# EAGLE board 00A-023 FRDM Protoboard (EAGLE 6.3)
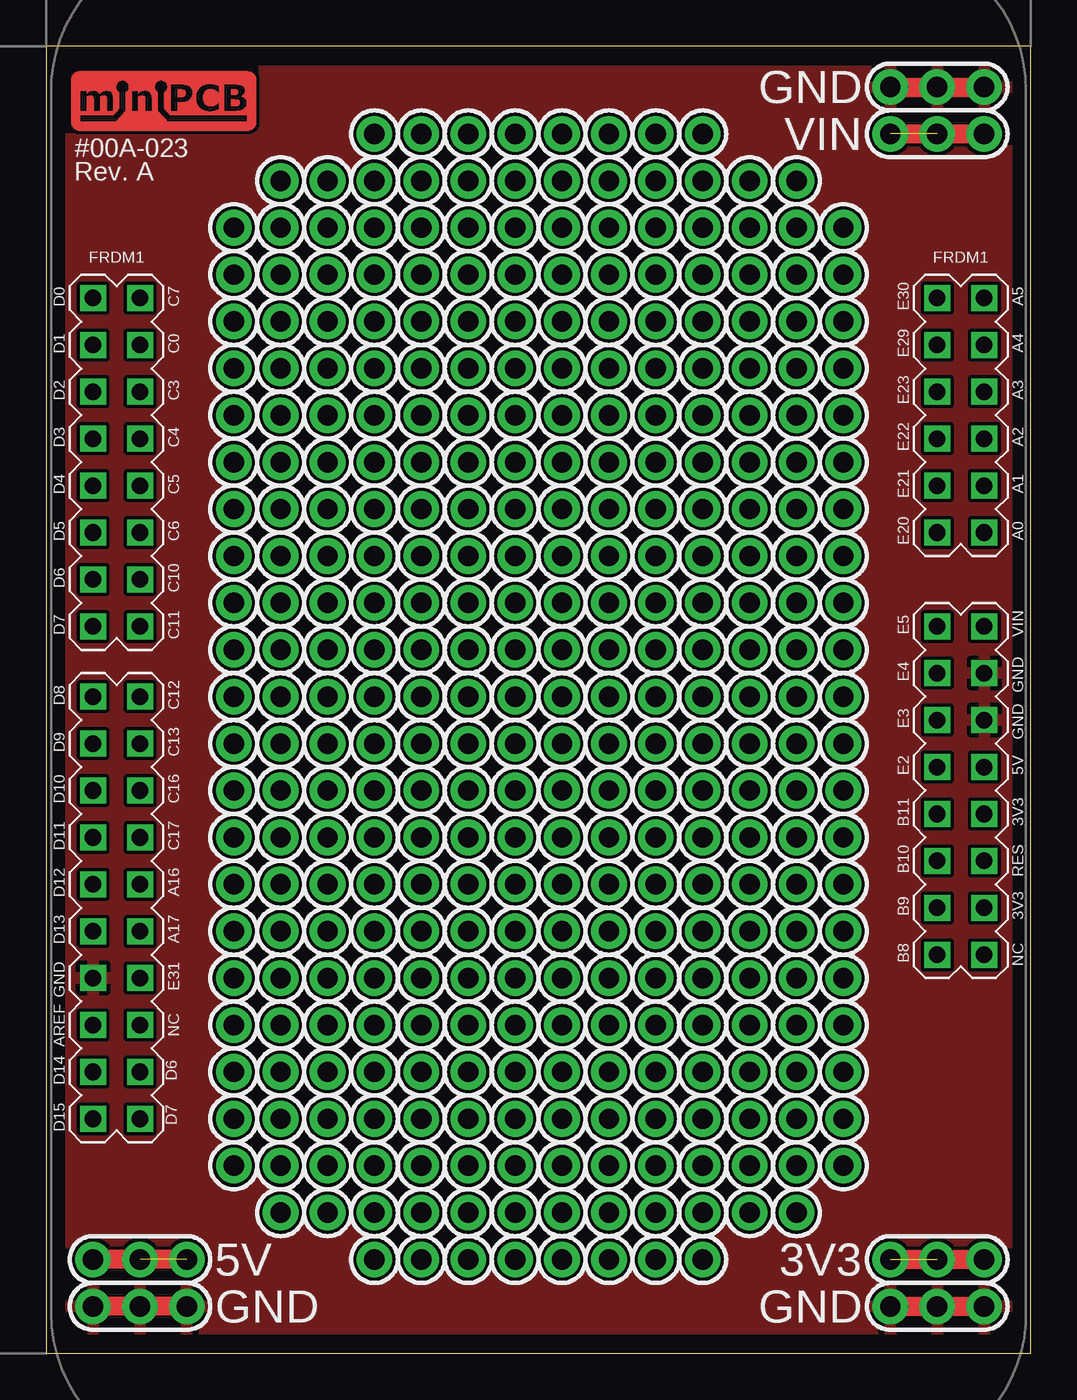
[diagram p0: board, top side]
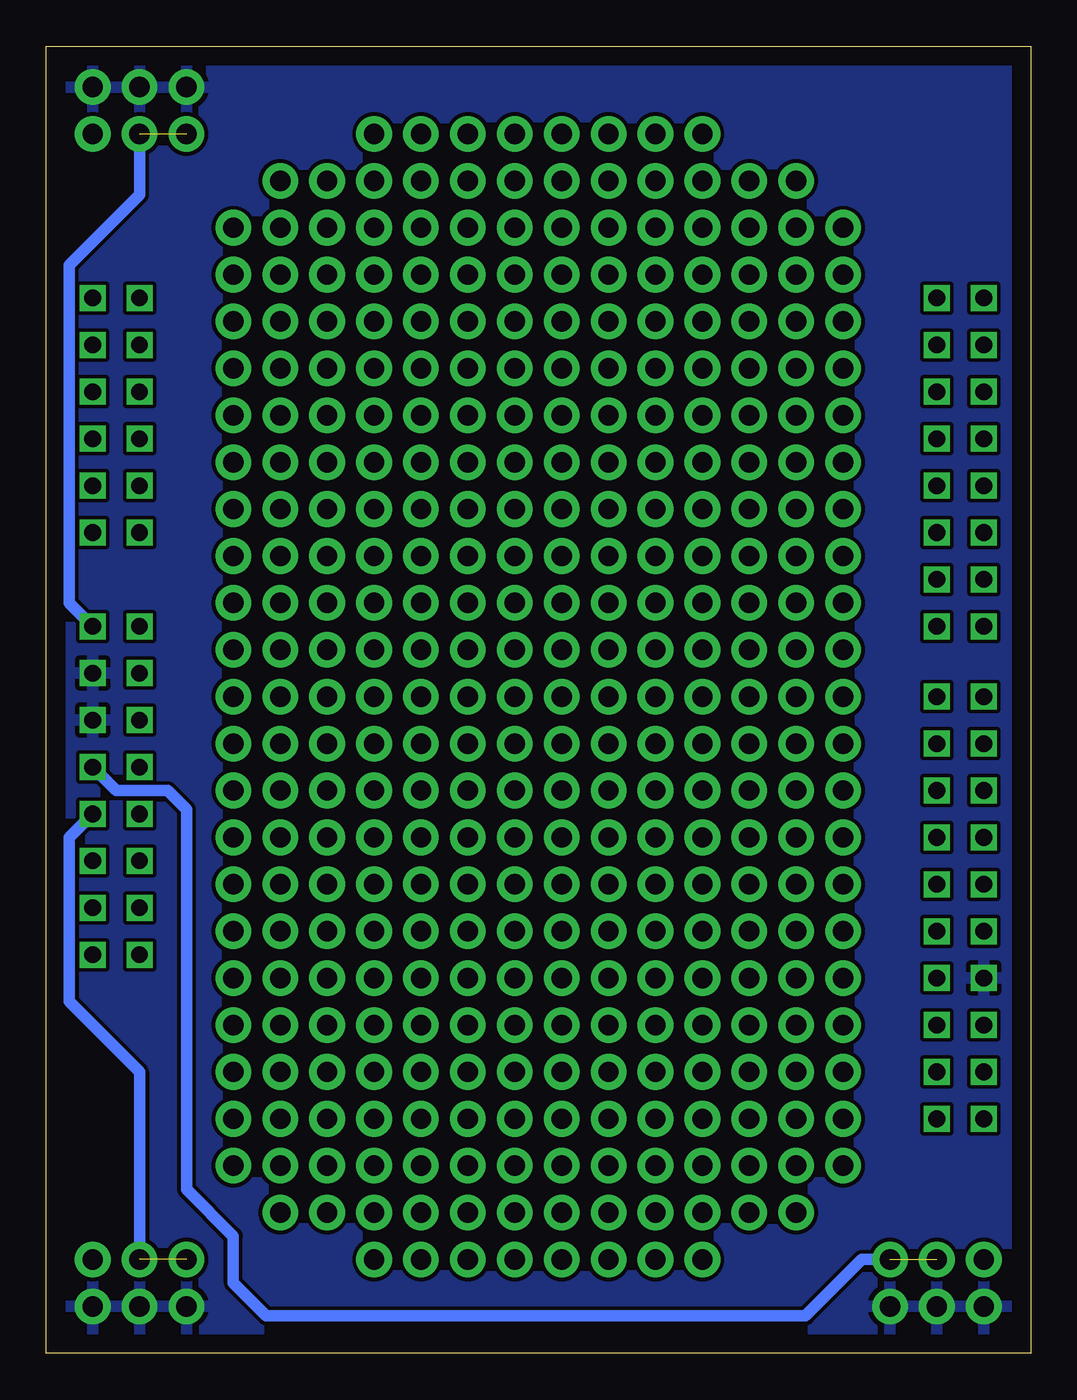
[diagram p1: board, bottom side, seen from below]

Size 53.32 x 70.79 mm. Coordinates in mm from the lower left corner, seen from the top.
Outline: 0,0 53.32,0 53.32,70.79 0,70.79 0,0
Copper layers (1*16): Top 0.035mm / dielectric 1.5mm / Bottom 0.035mm
Design rules "default": minimum track width 10mil, minimum drill 24mil, track to track 8mil, track to pad 8mil, pad to pad 8mil, via to via 8mil, smd to smd 8mil, copper to edge 40mil, drill to drill 8mil, minimum pad ring 10mil, minimum via ring 8mil, stop-mask expansion 4mil, vias tented up to drill 0mil, thermal gap 10mil

## Footprints (pad centres in the part's own frame; a part is rotated, then mirrored left to right if it is on the bottom)
FRDM_KL25Z_NORMAL = drill 0.9 square: 3V3 24.13,-15.24; 5V 24.13,-7.62; A0 24.13,5.08; A1 24.13,7.62; A2 24.13,10.16; A3 24.13,12.7; A4 24.13,15.24; A5 24.13,17.78; AREF -24.13,-21.59; D0 -24.13,17.78; D1 -24.13,15.24; D2 -24.13,12.7; D3 -24.13,10.16; D4 -24.13,7.62; D5 -24.13,5.08; D6 -24.13,2.54; D7 -24.13,0; D8 -24.13,-3.81; D9 -24.13,-6.35; D10 -24.13,-8.89; D11 -24.13,-11.43; D12 -24.13,-13.97; D13 -24.13,-16.51; D14 -24.13,-24.13; D15 -24.13,-26.67; GND0 24.13,-2.54; GND1 24.13,-5.08; GND2 -24.13,-19.05; NC1 24.13,-17.78; NC2 -21.59,-21.59; P3V3 24.13,-10.16; PTA16 -21.59,-13.97; PTA17 -21.59,-16.51; PTB8 21.59,-17.78; PTB9 21.59,-15.24; PTB10 21.59,-12.7; PTB11 21.59,-10.16; PTC0 -21.59,15.24; PTC3 -21.59,12.7; PTC4 -21.59,10.16; PTC5 -21.59,7.62; PTC6 -21.59,5.08; PTC7 -21.59,17.78; PTC10 -21.59,2.54; PTC11 -21.59,0; PTC12 -21.59,-3.81; PTC13 -21.59,-6.35; PTC16 -21.59,-8.89; PTC17 -21.59,-11.43; PTD6 -21.59,-24.13; PTD7 -21.59,-26.67; PTE2 21.59,-7.62; PTE3 21.59,-5.08; PTE4 21.59,-2.54; PTE5 21.59,0; PTE20 21.59,5.08; PTE21 21.59,7.62; PTE22 21.59,10.16; PTE23 21.59,12.7; PTE29 21.59,15.24; PTE30 21.59,17.78; PTE31 -21.59,-19.05; RESET 24.13,-12.7; VIN 24.13,0
PINS_1-1P_VALUE = drill 1.1 pad 1.93: 1 0,0
PINS_1-3P_VALUE = drill 1.1 pad 1.93: 1 0,0; 2 2.54,0; 3 5.08,0

## Placement (x,y rotation side)
FRDM1  FRDM-KL25ZNORMAL  [FRDM_KL25Z_NORMAL]  26.67,39.37 0 top
P1  [PINS_1-1P_VALUE]  15.24,58.42 0 top
P2  [PINS_1-1P_VALUE]  15.24,55.88 0 top
P3  [PINS_1-1P_VALUE]  15.24,53.34 0 top
P4  [PINS_1-1P_VALUE]  15.24,50.8 0 top
P5  [PINS_1-1P_VALUE]  15.24,22.86 0 top
P6  [PINS_1-1P_VALUE]  15.24,48.26 0 top
P7  [PINS_1-1P_VALUE]  15.24,20.32 0 top
P8  [PINS_1-1P_VALUE]  15.24,45.72 0 top
P9  [PINS_1-1P_VALUE]  15.24,17.78 0 top
P10  [PINS_1-1P_VALUE]  15.24,43.18 0 top
P11  [PINS_1-1P_VALUE]  15.24,15.24 0 top
P12  [PINS_1-1P_VALUE]  15.24,33.02 0 top
P13  [PINS_1-1P_VALUE]  15.24,40.64 0 top
P14  [PINS_1-1P_VALUE]  15.24,12.7 0 top
P15  [PINS_1-1P_VALUE]  10.16,12.7 0 top
P16  [PINS_1-1P_VALUE]  15.24,30.48 0 top
P17  [PINS_1-1P_VALUE]  15.24,38.1 0 top
P18  [PINS_1-1P_VALUE]  15.24,10.16 0 top
P19  [PINS_1-1P_VALUE]  15.24,63.5 0 top
P20  [PINS_1-1P_VALUE]  15.24,60.96 0 top
P21  [PINS_1-1P_VALUE]  15.24,27.94 0 top
P22  [PINS_1-1P_VALUE]  15.24,35.56 0 top
P23  [PINS_1-1P_VALUE]  15.24,7.62 0 top
P24  [PINS_1-1P_VALUE]  15.24,25.4 0 top
P25  [PINS_1-1P_VALUE]  10.16,58.42 0 top
P26  [PINS_1-1P_VALUE]  17.78,45.72 0 top
P27  [PINS_1-1P_VALUE]  17.78,43.18 0 top
P28  [PINS_1-1P_VALUE]  17.78,50.8 0 top
P29  [PINS_1-1P_VALUE]  17.78,40.64 0 top
P30  [PINS_1-1P_VALUE]  17.78,38.1 0 top
P31  [PINS_1-1P_VALUE]  17.78,55.88 0 top
P32  [PINS_1-1P_VALUE]  17.78,35.56 0 top
P33  [PINS_1-1P_VALUE]  17.78,33.02 0 top
P34  [PINS_1-1P_VALUE]  17.78,60.96 0 top
P35  [PINS_1-1P_VALUE]  17.78,30.48 0 top
P36  [PINS_1-1P_VALUE]  17.78,27.94 0 top
P37  [PINS_1-1P_VALUE]  17.78,66.04 0 top
P38  [PINS_1-1P_VALUE]  17.78,25.4 0 top
P39  [PINS_1-1P_VALUE]  17.78,22.86 0 top
P40  [PINS_1-1P_VALUE]  17.78,63.5 0 top
P41  [PINS_1-1P_VALUE]  17.78,20.32 0 top
P42  [PINS_1-1P_VALUE]  17.78,17.78 0 top
P43  [PINS_1-1P_VALUE]  17.78,58.42 0 top
P44  [PINS_1-1P_VALUE]  17.78,15.24 0 top
P45  [PINS_1-1P_VALUE]  17.78,12.7 0 top
P46  [PINS_1-1P_VALUE]  17.78,53.34 0 top
P47  [PINS_1-1P_VALUE]  17.78,10.16 0 top
P48  [PINS_1-1P_VALUE]  17.78,7.62 0 top
P49  [PINS_1-1P_VALUE]  17.78,48.26 0 top
P50  [PINS_1-1P_VALUE]  17.78,5.08 0 top
P51  [PINS_1-1P_VALUE]  20.32,66.04 0 top
P52  [PINS_1-1P_VALUE]  20.32,63.5 0 top
P53  [PINS_1-1P_VALUE]  20.32,20.32 0 top
P54  [PINS_1-1P_VALUE]  20.32,60.96 0 top
P55  [PINS_1-1P_VALUE]  20.32,58.42 0 top
P56  [PINS_1-1P_VALUE]  20.32,15.24 0 top
P57  3V3  [PINS_1-3P_VALUE]  45.72,5.08 0 top
P58  5V  [PINS_1-3P_VALUE]  7.62,5.08 180 top
P59  VIN  [PINS_1-3P_VALUE]  45.72,66.04 0 top
P60  [PINS_1-1P_VALUE]  20.32,55.88 0 top
P61  [PINS_1-1P_VALUE]  20.32,53.34 0 top
P62  [PINS_1-1P_VALUE]  20.32,10.16 0 top
P63  [PINS_1-1P_VALUE]  20.32,50.8 0 top
P64  [PINS_1-1P_VALUE]  20.32,48.26 0 top
P65  [PINS_1-1P_VALUE]  20.32,5.08 0 top
P66  [PINS_1-1P_VALUE]  20.32,45.72 0 top
P67  [PINS_1-1P_VALUE]  20.32,43.18 0 top
P68  [PINS_1-1P_VALUE]  20.32,22.86 0 top
P69  [PINS_1-1P_VALUE]  20.32,40.64 0 top
P70  [PINS_1-1P_VALUE]  20.32,38.1 0 top
P71  [PINS_1-1P_VALUE]  20.32,17.78 0 top
P72  [PINS_1-1P_VALUE]  20.32,35.56 0 top
P73  [PINS_1-1P_VALUE]  20.32,33.02 0 top
P74  [PINS_1-1P_VALUE]  20.32,12.7 0 top
P75  [PINS_1-1P_VALUE]  20.32,30.48 0 top
P76  [PINS_1-1P_VALUE]  20.32,27.94 0 top
P77  [PINS_1-1P_VALUE]  20.32,7.62 0 top
P78  [PINS_1-1P_VALUE]  20.32,25.4 0 top
P79  [PINS_1-1P_VALUE]  22.86,66.04 0 top
P80  [PINS_1-1P_VALUE]  22.86,63.5 0 top
P81  [PINS_1-1P_VALUE]  22.86,20.32 0 top
P82  [PINS_1-1P_VALUE]  22.86,60.96 0 top
P83  [PINS_1-1P_VALUE]  22.86,58.42 0 top
P84  [PINS_1-1P_VALUE]  22.86,15.24 0 top
P85  [PINS_1-1P_VALUE]  22.86,55.88 0 top
P86  [PINS_1-1P_VALUE]  22.86,53.34 0 top
P87  [PINS_1-1P_VALUE]  22.86,10.16 0 top
P88  [PINS_1-1P_VALUE]  22.86,50.8 0 top
P89  [PINS_1-1P_VALUE]  22.86,48.26 0 top
P90  [PINS_1-1P_VALUE]  22.86,5.08 0 top
P91  [PINS_1-1P_VALUE]  22.86,45.72 0 top
P92  [PINS_1-1P_VALUE]  22.86,43.18 0 top
P93  [PINS_1-1P_VALUE]  22.86,22.86 0 top
P94  [PINS_1-1P_VALUE]  22.86,40.64 0 top
P95  [PINS_1-1P_VALUE]  22.86,38.1 0 top
P96  [PINS_1-1P_VALUE]  22.86,17.78 0 top
P97  [PINS_1-1P_VALUE]  22.86,35.56 0 top
P98  [PINS_1-1P_VALUE]  22.86,33.02 0 top
P99  [PINS_1-1P_VALUE]  22.86,12.7 0 top
P100  [PINS_1-1P_VALUE]  22.86,30.48 0 top
P101  [PINS_1-1P_VALUE]  22.86,27.94 0 top
P102  GND  [PINS_1-3P_VALUE]  45.72,2.54 0 top
P103  GND  [PINS_1-3P_VALUE]  7.62,2.54 180 top
P104  [PINS_1-1P_VALUE]  22.86,7.62 0 top
P105  [PINS_1-1P_VALUE]  22.86,25.4 0 top
P106  [PINS_1-1P_VALUE]  25.4,66.04 0 top
P107  [PINS_1-1P_VALUE]  25.4,63.5 0 top
P108  [PINS_1-1P_VALUE]  25.4,20.32 0 top
P109  [PINS_1-1P_VALUE]  25.4,60.96 0 top
P110  [PINS_1-1P_VALUE]  25.4,58.42 0 top
P111  [PINS_1-1P_VALUE]  25.4,15.24 0 top
P112  [PINS_1-1P_VALUE]  25.4,55.88 0 top
P113  [PINS_1-1P_VALUE]  25.4,53.34 0 top
P114  GND  [PINS_1-3P_VALUE]  45.72,68.58 0 top
P115  [PINS_1-1P_VALUE]  25.4,10.16 0 top
P116  [PINS_1-1P_VALUE]  25.4,50.8 0 top
P117  [PINS_1-1P_VALUE]  25.4,48.26 0 top
P118  [PINS_1-1P_VALUE]  25.4,5.08 0 top
P119  [PINS_1-1P_VALUE]  25.4,45.72 0 top
P120  [PINS_1-1P_VALUE]  25.4,43.18 0 top
P121  [PINS_1-1P_VALUE]  25.4,22.86 0 top
P122  [PINS_1-1P_VALUE]  25.4,40.64 0 top
P123  [PINS_1-1P_VALUE]  25.4,38.1 0 top
P124  [PINS_1-1P_VALUE]  25.4,17.78 0 top
P125  [PINS_1-1P_VALUE]  25.4,35.56 0 top
P126  [PINS_1-1P_VALUE]  25.4,33.02 0 top
P127  [PINS_1-1P_VALUE]  25.4,12.7 0 top
P128  [PINS_1-1P_VALUE]  25.4,30.48 0 top
P129  [PINS_1-1P_VALUE]  25.4,27.94 0 top
P130  [PINS_1-1P_VALUE]  25.4,7.62 0 top
P131  [PINS_1-1P_VALUE]  25.4,25.4 0 top
P132  [PINS_1-1P_VALUE]  27.94,66.04 0 top
P133  [PINS_1-1P_VALUE]  27.94,63.5 0 top
P134  [PINS_1-1P_VALUE]  27.94,20.32 0 top
P135  [PINS_1-1P_VALUE]  27.94,60.96 0 top
P136  [PINS_1-1P_VALUE]  27.94,58.42 0 top
P137  [PINS_1-1P_VALUE]  27.94,15.24 0 top
P138  [PINS_1-1P_VALUE]  27.94,55.88 0 top
P139  [PINS_1-1P_VALUE]  27.94,53.34 0 top
P140  [PINS_1-1P_VALUE]  27.94,10.16 0 top
P141  [PINS_1-1P_VALUE]  27.94,50.8 0 top
P142  [PINS_1-1P_VALUE]  27.94,48.26 0 top
P143  [PINS_1-1P_VALUE]  27.94,5.08 0 top
P144  [PINS_1-1P_VALUE]  27.94,45.72 0 top
P145  [PINS_1-1P_VALUE]  27.94,43.18 0 top
P146  [PINS_1-1P_VALUE]  27.94,22.86 0 top
P147  [PINS_1-1P_VALUE]  27.94,40.64 0 top
P148  [PINS_1-1P_VALUE]  27.94,38.1 0 top
P149  [PINS_1-1P_VALUE]  27.94,17.78 0 top
P150  [PINS_1-1P_VALUE]  27.94,35.56 0 top
P151  [PINS_1-1P_VALUE]  27.94,33.02 0 top
P152  [PINS_1-1P_VALUE]  27.94,12.7 0 top
P153  [PINS_1-1P_VALUE]  27.94,30.48 0 top
P154  [PINS_1-1P_VALUE]  27.94,27.94 0 top
P155  [PINS_1-1P_VALUE]  27.94,7.62 0 top
P156  [PINS_1-1P_VALUE]  27.94,25.4 0 top
P157  [PINS_1-1P_VALUE]  30.48,66.04 0 top
P158  [PINS_1-1P_VALUE]  30.48,63.5 0 top
P159  [PINS_1-1P_VALUE]  30.48,20.32 0 top
P160  [PINS_1-1P_VALUE]  30.48,60.96 0 top
P161  [PINS_1-1P_VALUE]  30.48,58.42 0 top
P162  [PINS_1-1P_VALUE]  30.48,15.24 0 top
P163  [PINS_1-1P_VALUE]  30.48,55.88 0 top
P164  [PINS_1-1P_VALUE]  30.48,53.34 0 top
P165  [PINS_1-1P_VALUE]  30.48,10.16 0 top
P166  [PINS_1-1P_VALUE]  30.48,50.8 0 top
P167  [PINS_1-1P_VALUE]  30.48,48.26 0 top
P168  [PINS_1-1P_VALUE]  30.48,5.08 0 top
P169  [PINS_1-1P_VALUE]  30.48,45.72 0 top
P170  [PINS_1-1P_VALUE]  30.48,43.18 0 top
P171  [PINS_1-1P_VALUE]  30.48,22.86 0 top
P172  [PINS_1-1P_VALUE]  30.48,40.64 0 top
P173  [PINS_1-1P_VALUE]  30.48,38.1 0 top
P174  [PINS_1-1P_VALUE]  30.48,17.78 0 top
P175  [PINS_1-1P_VALUE]  30.48,35.56 0 top
P176  [PINS_1-1P_VALUE]  30.48,33.02 0 top
P177  [PINS_1-1P_VALUE]  30.48,12.7 0 top
P178  [PINS_1-1P_VALUE]  30.48,30.48 0 top
P179  [PINS_1-1P_VALUE]  30.48,27.94 0 top
P180  [PINS_1-1P_VALUE]  30.48,7.62 0 top
P181  [PINS_1-1P_VALUE]  30.48,25.4 0 top
P182  [PINS_1-1P_VALUE]  33.02,66.04 0 top
P183  [PINS_1-1P_VALUE]  33.02,63.5 0 top
P184  [PINS_1-1P_VALUE]  33.02,20.32 0 top
P185  [PINS_1-1P_VALUE]  33.02,60.96 0 top
P186  [PINS_1-1P_VALUE]  33.02,58.42 0 top
P187  [PINS_1-1P_VALUE]  33.02,15.24 0 top
P188  [PINS_1-1P_VALUE]  33.02,55.88 0 top
P189  [PINS_1-1P_VALUE]  33.02,53.34 0 top
P190  [PINS_1-1P_VALUE]  33.02,10.16 0 top
P191  [PINS_1-1P_VALUE]  33.02,50.8 0 top
P192  [PINS_1-1P_VALUE]  33.02,48.26 0 top
P193  [PINS_1-1P_VALUE]  33.02,5.08 0 top
P194  [PINS_1-1P_VALUE]  33.02,45.72 0 top
P195  [PINS_1-1P_VALUE]  33.02,43.18 0 top
P196  [PINS_1-1P_VALUE]  33.02,22.86 0 top
P197  [PINS_1-1P_VALUE]  33.02,40.64 0 top
P198  [PINS_1-1P_VALUE]  33.02,38.1 0 top
P199  [PINS_1-1P_VALUE]  33.02,17.78 0 top
P200  [PINS_1-1P_VALUE]  33.02,35.56 0 top
P201  [PINS_1-1P_VALUE]  33.02,33.02 0 top
P202  [PINS_1-1P_VALUE]  33.02,12.7 0 top
P203  [PINS_1-1P_VALUE]  33.02,30.48 0 top
P204  [PINS_1-1P_VALUE]  33.02,27.94 0 top
P205  [PINS_1-1P_VALUE]  33.02,7.62 0 top
P206  [PINS_1-1P_VALUE]  33.02,25.4 0 top
P207  [PINS_1-1P_VALUE]  35.56,66.04 0 top
P208  [PINS_1-1P_VALUE]  35.56,63.5 0 top
P209  [PINS_1-1P_VALUE]  35.56,22.86 0 top
P210  [PINS_1-1P_VALUE]  35.56,60.96 0 top
P211  [PINS_1-1P_VALUE]  35.56,58.42 0 top
P212  [PINS_1-1P_VALUE]  35.56,17.78 0 top
P213  [PINS_1-1P_VALUE]  35.56,55.88 0 top
P214  [PINS_1-1P_VALUE]  35.56,53.34 0 top
P215  [PINS_1-1P_VALUE]  35.56,12.7 0 top
P216  [PINS_1-1P_VALUE]  35.56,50.8 0 top
P217  [PINS_1-1P_VALUE]  35.56,48.26 0 top
P218  [PINS_1-1P_VALUE]  35.56,7.62 0 top
P219  [PINS_1-1P_VALUE]  35.56,45.72 0 top
P220  [PINS_1-1P_VALUE]  35.56,43.18 0 top
P221  [PINS_1-1P_VALUE]  35.56,20.32 0 top
P222  [PINS_1-1P_VALUE]  35.56,40.64 0 top
P223  [PINS_1-1P_VALUE]  35.56,38.1 0 top
P224  [PINS_1-1P_VALUE]  35.56,15.24 0 top
P225  [PINS_1-1P_VALUE]  35.56,35.56 0 top
P226  [PINS_1-1P_VALUE]  35.56,33.02 0 top
P227  [PINS_1-1P_VALUE]  35.56,10.16 0 top
P228  [PINS_1-1P_VALUE]  35.56,30.48 0 top
P229  [PINS_1-1P_VALUE]  35.56,27.94 0 top
P230  [PINS_1-1P_VALUE]  35.56,5.08 0 top
P231  [PINS_1-1P_VALUE]  35.56,25.4 0 top
P232  [PINS_1-1P_VALUE]  43.18,58.42 0 top
P233  [PINS_1-1P_VALUE]  38.1,63.5 0 top
P234  [PINS_1-1P_VALUE]  38.1,22.86 0 top
P235  [PINS_1-1P_VALUE]  38.1,60.96 0 top
P236  [PINS_1-1P_VALUE]  38.1,58.42 0 top
P237  [PINS_1-1P_VALUE]  38.1,17.78 0 top
P238  [PINS_1-1P_VALUE]  38.1,55.88 0 top
P239  [PINS_1-1P_VALUE]  38.1,53.34 0 top
P240  [PINS_1-1P_VALUE]  38.1,12.7 0 top
P241  [PINS_1-1P_VALUE]  38.1,50.8 0 top
P242  [PINS_1-1P_VALUE]  38.1,48.26 0 top
P243  [PINS_1-1P_VALUE]  38.1,7.62 0 top
P244  [PINS_1-1P_VALUE]  38.1,45.72 0 top
P245  [PINS_1-1P_VALUE]  38.1,43.18 0 top
P246  [PINS_1-1P_VALUE]  38.1,20.32 0 top
P247  [PINS_1-1P_VALUE]  38.1,40.64 0 top
P248  [PINS_1-1P_VALUE]  38.1,38.1 0 top
P249  [PINS_1-1P_VALUE]  38.1,15.24 0 top
P250  [PINS_1-1P_VALUE]  38.1,35.56 0 top
P251  [PINS_1-1P_VALUE]  38.1,33.02 0 top
P252  [PINS_1-1P_VALUE]  38.1,10.16 0 top
P253  [PINS_1-1P_VALUE]  38.1,30.48 0 top
P254  [PINS_1-1P_VALUE]  38.1,27.94 0 top
P255  [PINS_1-1P_VALUE]  43.18,12.7 0 top
P256  [PINS_1-1P_VALUE]  38.1,25.4 0 top
P257  [PINS_1-1P_VALUE]  43.18,60.96 0 top
P258  [PINS_1-1P_VALUE]  40.64,63.5 0 top
P259  [PINS_1-1P_VALUE]  40.64,22.86 0 top
P260  [PINS_1-1P_VALUE]  40.64,60.96 0 top
P261  [PINS_1-1P_VALUE]  40.64,58.42 0 top
P262  [PINS_1-1P_VALUE]  40.64,17.78 0 top
P263  [PINS_1-1P_VALUE]  40.64,55.88 0 top
P264  [PINS_1-1P_VALUE]  40.64,53.34 0 top
P265  [PINS_1-1P_VALUE]  40.64,12.7 0 top
P266  [PINS_1-1P_VALUE]  40.64,50.8 0 top
P267  [PINS_1-1P_VALUE]  40.64,48.26 0 top
P268  [PINS_1-1P_VALUE]  40.64,7.62 0 top
P269  [PINS_1-1P_VALUE]  40.64,45.72 0 top
P270  [PINS_1-1P_VALUE]  40.64,43.18 0 top
P271  [PINS_1-1P_VALUE]  40.64,20.32 0 top
P272  [PINS_1-1P_VALUE]  40.64,40.64 0 top
P273  [PINS_1-1P_VALUE]  40.64,38.1 0 top
P274  [PINS_1-1P_VALUE]  40.64,15.24 0 top
P275  [PINS_1-1P_VALUE]  40.64,35.56 0 top
P276  [PINS_1-1P_VALUE]  40.64,33.02 0 top
P277  [PINS_1-1P_VALUE]  40.64,10.16 0 top
P278  [PINS_1-1P_VALUE]  40.64,30.48 0 top
P279  [PINS_1-1P_VALUE]  40.64,27.94 0 top
P280  [PINS_1-1P_VALUE]  43.18,10.16 0 top
P281  [PINS_1-1P_VALUE]  40.64,25.4 0 top
P282  [PINS_1-1P_VALUE]  10.16,60.96 0 top
P283  [PINS_1-1P_VALUE]  12.7,63.5 0 top
P284  [PINS_1-1P_VALUE]  12.7,22.86 0 top
P285  [PINS_1-1P_VALUE]  12.7,60.96 0 top
P286  [PINS_1-1P_VALUE]  12.7,58.42 0 top
P287  [PINS_1-1P_VALUE]  12.7,17.78 0 top
P288  [PINS_1-1P_VALUE]  12.7,55.88 0 top
P289  [PINS_1-1P_VALUE]  12.7,53.34 0 top
P290  [PINS_1-1P_VALUE]  12.7,12.7 0 top
P291  [PINS_1-1P_VALUE]  12.7,50.8 0 top
P292  [PINS_1-1P_VALUE]  12.7,48.26 0 top
P293  [PINS_1-1P_VALUE]  12.7,7.62 0 top
P294  [PINS_1-1P_VALUE]  12.7,45.72 0 top
P295  [PINS_1-1P_VALUE]  12.7,43.18 0 top
P296  [PINS_1-1P_VALUE]  12.7,20.32 0 top
P297  [PINS_1-1P_VALUE]  12.7,40.64 0 top
P298  [PINS_1-1P_VALUE]  12.7,38.1 0 top
P299  [PINS_1-1P_VALUE]  12.7,15.24 0 top
P300  [PINS_1-1P_VALUE]  12.7,35.56 0 top
P301  [PINS_1-1P_VALUE]  12.7,33.02 0 top
P302  [PINS_1-1P_VALUE]  12.7,10.16 0 top
P303  [PINS_1-1P_VALUE]  12.7,30.48 0 top
P304  [PINS_1-1P_VALUE]  12.7,27.94 0 top
P305  [PINS_1-1P_VALUE]  10.16,10.16 0 top
P306  [PINS_1-1P_VALUE]  12.7,25.4 0 top
P307  [PINS_1-1P_VALUE]  10.16,55.88 0 top
P308  [PINS_1-1P_VALUE]  10.16,40.64 0 top
P309  [PINS_1-1P_VALUE]  10.16,17.78 0 top
P310  [PINS_1-1P_VALUE]  43.18,55.88 0 top
P311  [PINS_1-1P_VALUE]  10.16,53.34 0 top
P312  [PINS_1-1P_VALUE]  10.16,30.48 0 top
P313  [PINS_1-1P_VALUE]  10.16,20.32 0 top
P314  [PINS_1-1P_VALUE]  43.18,53.34 0 top
P315  [PINS_1-1P_VALUE]  10.16,50.8 0 top
P316  [PINS_1-1P_VALUE]  10.16,33.02 0 top
P317  [PINS_1-1P_VALUE]  10.16,22.86 0 top
P318  [PINS_1-1P_VALUE]  43.18,50.8 0 top
P319  [PINS_1-1P_VALUE]  10.16,48.26 0 top
P320  [PINS_1-1P_VALUE]  10.16,35.56 0 top
P321  [PINS_1-1P_VALUE]  10.16,25.4 0 top
P322  [PINS_1-1P_VALUE]  43.18,48.26 0 top
P323  [PINS_1-1P_VALUE]  10.16,45.72 0 top
P324  [PINS_1-1P_VALUE]  10.16,38.1 0 top
P325  [PINS_1-1P_VALUE]  10.16,27.94 0 top
P326  [PINS_1-1P_VALUE]  10.16,15.24 0 top
P327  [PINS_1-1P_VALUE]  10.16,43.18 0 top
P328  [PINS_1-1P_VALUE]  43.18,45.72 0 top
P329  [PINS_1-1P_VALUE]  43.18,43.18 0 top
P330  [PINS_1-1P_VALUE]  43.18,40.64 0 top
P331  [PINS_1-1P_VALUE]  43.18,38.1 0 top
P332  [PINS_1-1P_VALUE]  43.18,35.56 0 top
P333  [PINS_1-1P_VALUE]  43.18,33.02 0 top
P334  [PINS_1-1P_VALUE]  43.18,30.48 0 top
P335  [PINS_1-1P_VALUE]  43.18,27.94 0 top
P336  [PINS_1-1P_VALUE]  43.18,25.4 0 top
P337  [PINS_1-1P_VALUE]  43.18,22.86 0 top
P338  [PINS_1-1P_VALUE]  43.18,20.32 0 top
P339  [PINS_1-1P_VALUE]  43.18,17.78 0 top
P340  [PINS_1-1P_VALUE]  43.18,15.24 0 top
U$1  MINIPCB_LOGO  [MINIPCB-LOGO]  6.35,67.82 0 top

## Library data of the parts
FRDM1 = nolan; AVAILABILITY: In Stock; DESCRIPTION: KL1x, KL2x, mbed-Enabled Development Freedom Kinetis ARM® Cortex®-M0+ MCU 32-Bit Embedded Evaluation Board; MF: NXP USA; MP: FRDM-KL25Z; PACKAGE: 0805 Freescale Semiconductor; PRICE: None; PURCHASE-URL: https://pricing.snapeda.com/search/part/FRDM-KL25Z/?ref=eda
P1-P340 U$1 = nolan

## Nets
GND: FRDM1.GND0 FRDM1.GND1 FRDM1.GND2 P102.1 P102.2 P102.3 P103.1 P103.2 P103.3 P114.1 P114.2 P114.3
N$57: FRDM1.P3V3 P57.1 P57.2 P57.3
N$58: FRDM1.5V P58.1 P58.2 P58.3
N$59: FRDM1.VIN P59.1 P59.2 P59.3

## Tracks (layer width: path | path; a pad name or v marks a point on that pad's centre or on a via)
GND
  pour Top: 1.27,1.27 52.07,1.27 52.07,69.85 1.27,69.85
  pour Bottom: 1.27,1.27 52.07,1.27 52.07,69.85 1.27,69.85
N$57  (1 unrouted)
  Bottom 0.61: FRDM1.P3V3 52.07,27.94 52.07,19.05 48.26,15.24 P57.2
N$58  (1 unrouted)
  Bottom 0.61: FRDM1.5V 49.53,30.48 46.74,30.48 45.72,29.46 45.72,8.89 43.18,6.35 43.18,3.81 41.4,2.03 12.19,2.03 9.14,5.08 P58.1
N$59  (1 unrouted)
  Bottom 0.61: FRDM1.VIN 52.07,40.64 52.07,58.93 48.26,62.74 P59.2

## Text on the board
tPlace: #00A-023 | Rev. A